# EAGLE board Placa Sensores 2019 (EAGLE 7.2.0)
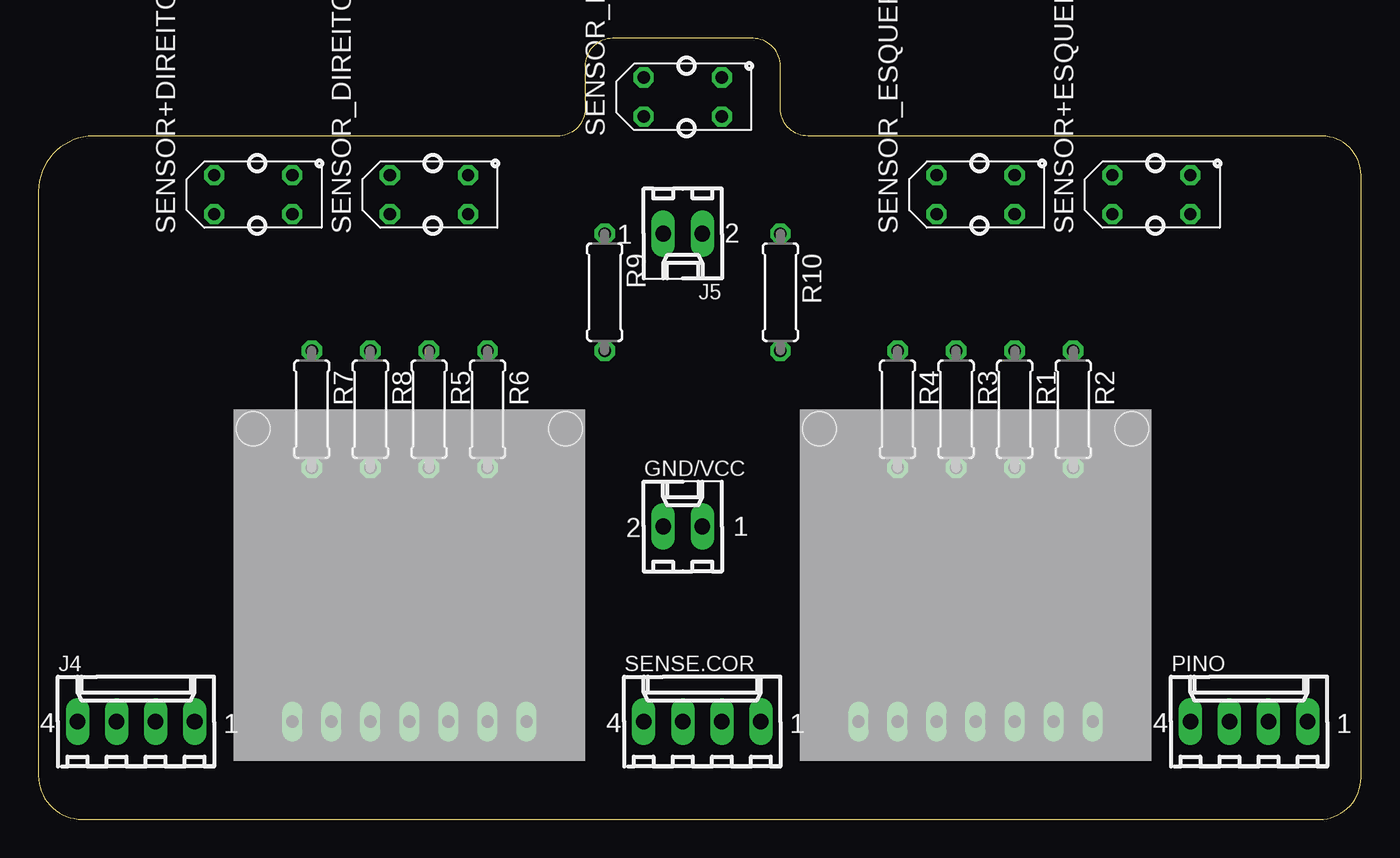
[diagram p0: board, top side]
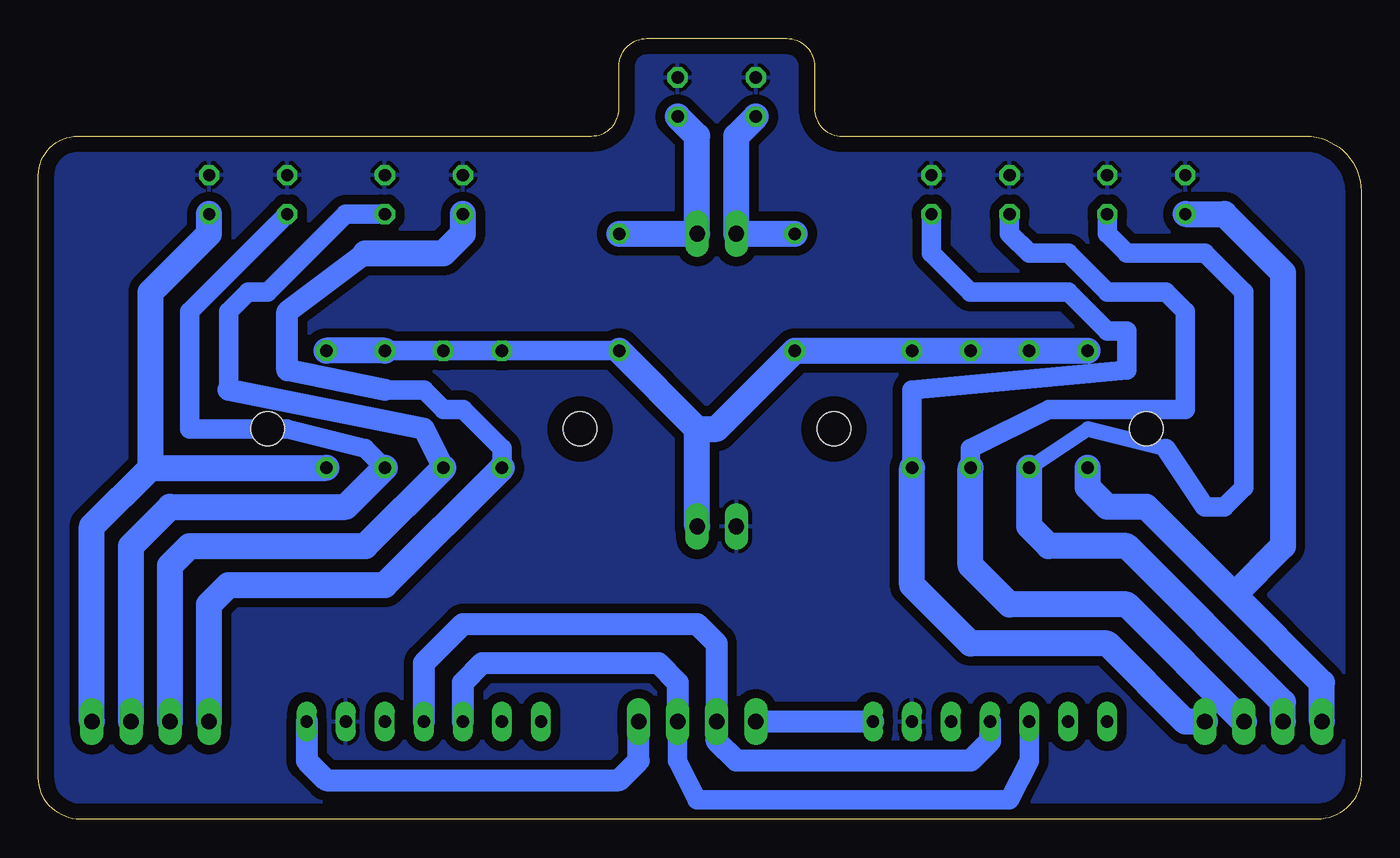
[diagram p1: board, bottom side, seen from below]

Size 86.03 x 50.8 mm. Coordinates in mm from the lower left corner, seen from the top.
Outline: 46.46,50.8 37.36,50.8 arc90 35.56,49 35.56,46.24 arc-90 33.76,44.44 3.58,44.44 arc90 0,40.86 0,2.84 arc90 2.84,0 83.32,0 arc90 86.03,2.71 86.03,41.9 arc90 83.49,44.44 50.06,44.45 arc-90 48.26,46.25 48.26,49 arc90 46.46,50.8
Copper layers (1*16): Top 0.035mm / dielectric 1.5mm / Bottom 0.035mm
Design rules "default *": minimum track width 60mil, minimum drill 24mil, track to track 24mil, track to pad 24mil, pad to pad 24mil, via to via 24mil, smd to smd 8mil, copper to edge 40mil, drill to drill 8mil, minimum pad ring 10mil, minimum via ring 8mil, stop-mask expansion 4mil, vias tented up to drill 0mil, thermal gap 10mil

## Footprints (pad centres in the part's own frame; a part is rotated, then mirrored left to right if it is on the bottom)
6410-02 = drill 1.016 long: 1 1.27,0; 2 -1.27,0
6410-04 = drill 1.016 long: 1 3.81,0; 2 1.27,0; 3 -1.27,0; 4 -3.81,0
0207/7 = drill 0.813 octagon: 1 -3.81,0; 2 3.81,0
TCRT5000 = drill 0.8 octagon: A -2.54,-1.27; C 2.54,-1.27; E 2.54,1.27; K -2.54,1.27
TCS34725 = drill 0.8 long: 3V3 0,-5.08; GND 2.54,-5.08; INT -7.62,-5.08; LED -10.16,-5.08; SCL -2.54,-5.08; SDA -5.08,-5.08; VIN 5.08,-5.08 | hole 2.2: -12.7,13.97; 7.62,13.97

## Placement (x,y rotation side)
GND/VCC  TENSÃO  [6410-02]  41.91,19.05 0 top
J4  [6410-04]  6.35,6.35 0 top
J5  [6410-02]  41.91,38.1 180 top
PINO  [6410-04]  78.74,6.35 0 top
R1  [0207/7]  63.5,26.67 270 top
R2  [0207/7]  67.31,26.67 270 top
R3  [0207/7]  59.69,26.67 270 top
R4  [0207/7]  55.88,26.67 270 top
R5  [0207/7]  25.4,26.67 270 top
R6  [0207/7]  29.21,26.67 270 top
R7  [0207/7]  17.78,26.67 270 top
R8  [0207/7]  21.59,26.67 270 top
R9  [0207/7]  36.83,34.29 270 top
R10  [0207/7]  48.26,34.29 270 top
SENSE.COR  [6410-04]  43.18,6.35 0 top
SENSOR+DIREITO  [TCRT5000]  13.97,40.64 0 top
SENSOR+ESQUERDO  [TCRT5000]  72.39,40.64 0 top
SENSOR_DIREITO  [TCRT5000]  25.4,40.64 0 top
SENSOR_ESQUERDO  [TCRT5000]  60.96,40.64 0 top
SENSOR_MEIO  [TCRT5000]  41.91,46.99 0 top
TCS1  TCS34725  [TCS34725]  63.5,11.43 0 top
TCS2  TCS34725  [TCS34725]  26.67,11.43 0 top

## Library data of the parts
GND/VCC J4 J5 PINO SENSE.COR = Robotica-IFRN-SC-conectores; OC_FARNELL: unknown; OC_NEWARK: unknown
R1-R10 = rcl
SENSOR+DIREITO SENSOR+ESQUERDO SENSOR_DIREITO SENSOR_ESQUERDO SENSOR_MEIO TCS1 TCS2 = Robotica-IFRN-SC-sensores

## Nets
+5V: GND/VCC.1 R1.1 R2.1 R3.1 R4.1 R5.1 R6.1 R7.1 R8.1 R9.2 R10.2
GND: GND/VCC.2 SENSOR+DIREITO.E SENSOR+DIREITO.K SENSOR+ESQUERDO.E SENSOR+ESQUERDO.K SENSOR_DIREITO.E SENSOR_DIREITO.K SENSOR_ESQUERDO.E SENSOR_ESQUERDO.K SENSOR_MEIO.E SENSOR_MEIO.K TCS1.GND TCS2.GND
N$1: SENSE.COR.1 TCS1.VIN
N$2: SENSE.COR.2 TCS1.SDA TCS2.SDA
N$3: SENSE.COR.3 TCS1.SCL TCS2.SCL
N$4: SENSE.COR.4 TCS2.VIN
N$5: PINO.1 R2.2 SENSOR+ESQUERDO.C
N$6: PINO.4 R4.2 SENSOR_ESQUERDO.A
N$7: J4.2 R5.2 SENSOR_DIREITO.A
N$8: PINO.2 R1.2 SENSOR+ESQUERDO.A
N$9: PINO.3 R3.2 SENSOR_ESQUERDO.C
N$10: J5.2 R10.1 SENSOR_MEIO.C
N$11: J5.1 R9.1 SENSOR_MEIO.A
N$13: J4.1 R6.2 SENSOR_DIREITO.C
N$15: J4.4 R7.2 SENSOR+DIREITO.A
N$17: J4.3 R8.2 SENSOR+DIREITO.C

## Tracks (layer width: path | path; a pad name or v marks a point on that pad's centre or on a via)
+5V
  Bottom 1.27: R10.2 R4.1 R3.1 R1.1
  Bottom 1.676: GND/VCC.1 43.18,25.4 | 43.18,25.4 R10.2 | R1.1 R2.1 | 43.18,25.4 41.91,25.4 R9.2 R6.1 R5.1 R8.1 R7.1
GND
  pour Bottom: 48.26,49 48.26,46.25 arc90 50.06,44.45 83.52,44.45 arc-90 86.36,41.61 86.36,2.84 arc-90 83.52,0 2.84,0 arc-90 0,2.84 0,40.86 arc-90 3.59,44.45 33.76,44.45 arc90 35.56,46.25 35.56,49 arc-90 37.36,50.8 46.46,50.8 arc-90
N$1
  Bottom 1.422: TCS1.VIN 68.58,3.81 67.31,2.54 48.26,2.54 46.99,3.81 SENSE.COR.1
N$2
  Bottom 1.27: TCS2.SDA 21.59,3.81 22.86,1.27 43.18,1.27 44.45,3.81 SENSE.COR.2
  Bottom 1.422: TCS1.SDA 58.42,8.89 57.15,10.16 45.72,10.16 44.45,8.89 SENSE.COR.2
N$3
  Bottom 1.422: TCS2.SCL 24.13,5.08 25.4,3.81 40.64,3.81 41.91,5.08 SENSE.COR.3 41.91,11.43 43.18,12.7 58.42,12.7 60.96,10.16 TCS1.SCL
N$4
  Bottom 1.422: TCS2.VIN SENSE.COR.4
N$5
  Bottom 1.676: PINO.1 82.55,19.05 78.74,22.86 | 78.74,22.86 R2.2 | 78.74,22.86 78.74,34.29 74.93,38.1 SENSOR+ESQUERDO.C
N$6
  Bottom 1.27: R4.2 55.88,24.13 58.42,26.67 59.69,26.67 60.96,27.94 63.5,27.94
  Bottom 1.422: 63.5,27.94 69.85,29.21 69.85,33.02 64.77,36.83
  Bottom 1.676: PINO.4 74.93,13.97 73.66,15.24 63.5,15.24 R4.2 | 64.77,36.83 59.69,36.83 58.42,38.1 SENSOR_ESQUERDO.A
N$7
  Bottom 1.27: R5.2 25.4,24.13 20.32,26.67 11.43,26.67 11.43,33.02 12.7,34.29 16.51,34.29 19.05,36.83 21.59,36.83 22.86,38.1 SENSOR_DIREITO.A
  Bottom 1.676: J4.2 15.24,13.97 22.86,13.97 25.4,16.51 R5.2
N$8
  Bottom 1.27: R1.2 64.77,24.13 69.85,25.4 76.2,25.4 76.2,33.02 SENSOR+ESQUERDO.A
  Bottom 1.676: PINO.2 80.01,17.78 77.47,20.32 66.04,20.32 R1.2
N$9
  Bottom 1.27: 73.66,27.94 73.66,33.02 72.39,34.29 71.12,34.29 66.04,39.37 SENSOR_ESQUERDO.C
  Bottom 1.422: R3.2 60.96,25.4 73.66,27.94
  Bottom 1.676: PINO.3 77.47,16.51 76.2,17.78 64.77,17.78 R3.2
N$10
  Bottom 1.676: R10.1 J5.2 43.18,44.45 SENSOR_MEIO.C
N$11
  Bottom 1.676: R9.1 J5.1 40.64,44.45 SENSOR_MEIO.A
N$13
  Bottom 1.27: R6.2 29.21,27.94 15.24,29.21 15.24,31.75 16.51,31.75 19.05,34.29 25.4,34.29 27.94,36.83 SENSOR_DIREITO.C
  Bottom 1.676: J4.1 11.43,6.35 16.51,11.43 25.4,11.43 29.21,15.24 R6.2
N$15
  Bottom 1.676: J4.4 2.54,8.89 8.26,14.6 | 8.26,14.6 13.97,20.32 16.51,20.32 17.78,21.59 R7.2 | SENSOR+DIREITO.A 8.89,39.37 5.08,35.56 5.08,17.78 8.26,14.6
N$17
  Bottom 1.016: R8.2 17.78,25.4 12.7,24.13
  Bottom 1.27: 12.7,24.13 10.16,20.32 8.89,20.32 7.62,21.59 7.62,34.29 10.16,36.83 15.24,36.83 16.51,38.1 SENSOR+DIREITO.C
  Bottom 1.676: J4.3 5.08,7.62 15.24,17.78 20.32,17.78 21.59,19.05 R8.2